# EAGLE board Line sensors - 4 (EAGLE 9.5.2)
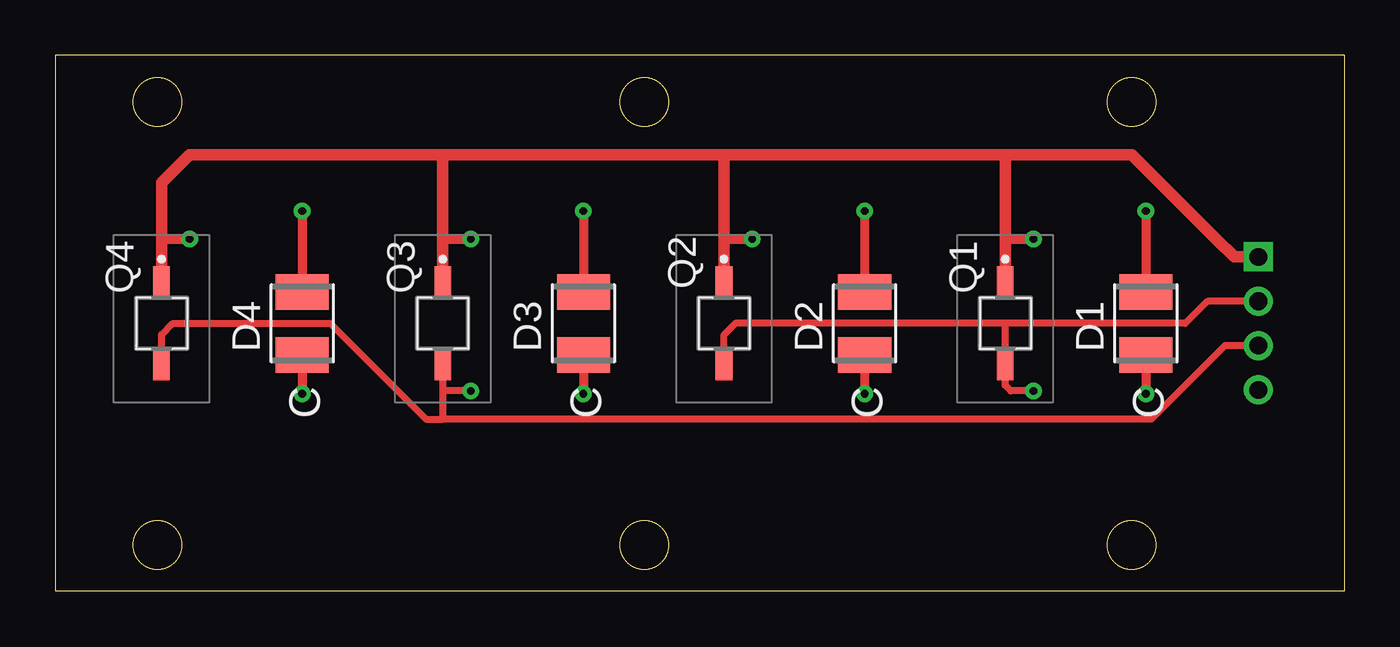
[diagram p0: board, top side]
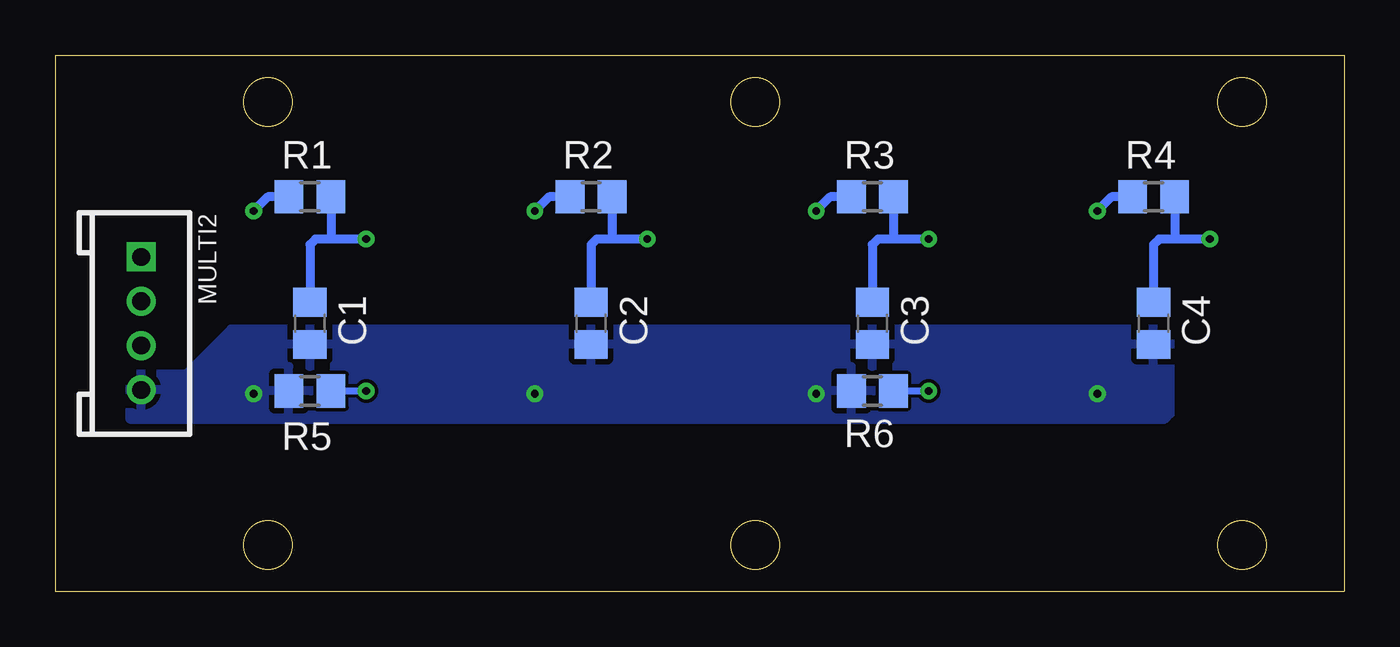
[diagram p1: board, bottom side, seen from below]

Size 58.2 x 24.19 mm. Coordinates in mm from the lower left corner, seen from the top.
Outline: 0,24.19 0,0 58.2,0 58.2,24.19 0,24.19
Outline: circle at 4.6,2.09 radius 1.1
Outline: circle at 48.6,22.09 radius 1.1
Outline: circle at 26.6,22.09 radius 1.1
Outline: circle at 4.6,22.09 radius 1.1
Outline: circle at 48.6,2.09 radius 1.1
Outline: circle at 26.6,2.09 radius 1.1
Copper layers (1*16): Top 0.035mm / dielectric 1.5mm / Bottom 0.035mm
Design rules "default": minimum track width 6mil, minimum drill 0.35mm, track to track 6mil, track to pad 6mil, pad to pad 6mil, via to via 6mil, smd to smd 6mil, copper to edge 40mil, drill to drill 6mil, minimum pad ring 10mil, minimum via ring 8mil, stop-mask expansion 4mil, vias tented up to drill 0mil, thermal gap 10mil

## Footprints (pad centres in the part's own frame; a part is rotated, then mirrored left to right if it is on the bottom)
C0805 = smd 1.3 x 1.5: 1 -0.95,0; 2 0.95,0
3528-2PIN = smd 1.6 x 2.4: 1 -1.425,0; 2 1.425,0
2.0_1X4 = drill 0.8 pad 1.27 square: 1 -3,0 | drill 0.8 pad 1.27: 2 -1,0; 3 1,0; 4 3,0
VEMT2520X01 = smd 1.35 x 0.75: 1 -1.9,0; 2 1.9,0
R0805 = smd 1.3 x 1.5: 1 -0.95,0; 2 0.95,0

## Placement (x,y rotation side)
C1  [C0805]  46.71,12.09 270 bottom
C2  [C0805]  34.01,12.09 270 bottom
C3  [C0805]  21.31,12.09 270 bottom
C4  [C0805]  8.61,12.09 270 bottom
D1  [3528-2PIN]  49.25,12.09 90 top
D2  [3528-2PIN]  36.55,12.09 90 top
D3  [3528-2PIN]  23.85,12.09 90 top
D4  [3528-2PIN]  11.15,12.09 90 top
MULTI2  TWIG_2.0  [2.0_1X4]  54.33,12.09 270 bottom
Q1  VEMT2520X01  [VEMT2520X01]  42.9,12.09 270 top
Q2  VEMT2520X01  [VEMT2520X01]  30.2,12.09 270 top
Q3  VEMT2520X01  [VEMT2520X01]  17.5,12.09 270 top
Q4  VEMT2520X01  [VEMT2520X01]  4.8,12.09 270 top
R1  [R0805]  46.71,17.81 0 bottom
R2  [R0805]  34.01,17.81 0 bottom
R3  [R0805]  21.31,17.81 0 bottom
R4  [R0805]  8.61,17.81 0 bottom
R5  [R0805]  46.71,9.04 0 bottom
R6  [R0805]  21.31,9.04 0 bottom

## Library data of the parts
C1-C4 = rcl; SPICEPREFIX: C
D1-D4 = Wurth_Elektronik_Optoelectronics_rev15b; COMPANY-URL: http://www.we-online.de; CREATED-BY: Christin Otto; CREATED-DATE: APR 2013; DATASHEET-URL: http://katalog.we-online.de/en/led/WL-SMTW?m=t&sq=smtw&sp=&sp=http%3A%2F%2Fwww.we-online.de%2Fweb%2Fen%2Felectronic_components%2Fsearchpage_PBS.php%3Fsearch%3Dsmtw; MANUFACTURER: Würth Elektronik eiSos GmbH
MULTI2 = CONNECTER
Q1-Q4 = Fototransistor; DESCRIPTION: Vishay VEMT2520X01 +/-15 IR + Visible Light Phototransistor, Surface Mount 2-Pin Reverse Gullwing Package; HEIGHT: 2mm; MANUFACTURER_NAME: Vishay; MANUFACTURER_PART_NUMBER: VEMT2520X01; MOUSER_PART_NUMBER: 782-VEMT2520X01; MOUSER_PRICE-STOCK: https://www.mouser.com/Search/Refine.aspx?Keyword=782-VEMT2520X01; RS_PART_NUMBER: 7689417P; RS_PRICE-STOCK: http://uk.rs-online.com/web/p/products/7689417P
R1-R6 = rcl; SPICEPREFIX: R

## Nets
GND: C1.2 C2.2 C3.2 C4.2 D1.1 D2.1 D3.1 D4.1 MULTI2.4 R5.1 R6.1
N$1: D1.2 R1.1
N$2: D2.2 R2.1
N$3: D3.2 R3.1
N$4: D4.2 R4.1
SIG1: MULTI2.2 Q1.2 Q2.2 R5.2
SIG2: MULTI2.3 Q3.2 Q4.2 R6.2
V+: C1.1 C2.1 C3.1 C4.1 MULTI2.1 Q1.1 Q2.1 Q3.1 Q4.1 R1.2 R2.2 R3.2 R4.2

## Tracks (layer width: path | path; a pad name or v marks a point on that pad's centre or on a via)
GND  (via drill 0.35)
  Top 0.406: D4.1 v11.15,8.92 | D3.1 v23.85,8.92 | D2.1 v36.55,8.92 | D1.1 v49.25,8.92
  pour Bottom: 7.84,11.84 50.26,11.84 52.29,9.81 54.83,9.81 54.83,7.77 8.1,7.77 7.84,8.03
N$1  (via drill 0.35)
  Top 0.406: v49.25,17.17 D1.2
  Bottom 0.406: R1.1 48.61,17.81 v49.25,17.17
N$2  (via drill 0.35)
  Top 0.406: v36.55,17.17 D2.2
  Bottom 0.406: R2.1 35.91,17.81 v36.55,17.17
N$3  (via drill 0.35)
  Top 0.406: v23.85,17.17 D3.2
  Bottom 0.406: R3.1 23.21,17.81 v23.85,17.17
N$4  (via drill 0.35)
  Top 0.406: v11.15,17.17 D4.2
  Bottom 0.406: R4.1 10.51,17.81 v11.15,17.17
SIG1  (via drill 0.35)
  Top 0.305: Q2.2 30.2,11.58 30.7,12.09 42.9,12.09 | 42.9,12.09 51.02,12.09 52.02,13.09 MULTI2.2 | 42.9,12.09 Q1.2 42.9,9.3 43.15,9.04 v44.17,9.04
  Bottom 0.305: R5.2 v44.17,9.04
SIG2  (via drill 0.35)
  Top 0.305: Q4.2 4.8,11.58 5.3,12.09 12.42,12.09 16.73,7.77 17.5,7.77 | Q3.2 17.5,9.04 | 17.5,9.04 17.5,7.77 | v18.77,9.04 17.5,9.04 | 17.5,7.77 49.5,7.77 52.82,11.09 MULTI2.3
  Bottom 0.305: R6.2 v18.77,9.04
V+  (via drill 0.35)
  Top 0.406: 4.8,15.9 v6.07,15.9 | 17.5,15.9 v18.77,15.9 | 30.2,15.9 v31.47,15.9 | 42.9,15.9 v44.17,15.9
  Top 0.508: 42.9,19.71 48.61,19.71 52.42,15.9 53.23,15.09 MULTI2.1 | 42.9,19.71 30.2,19.71 | 30.2,19.71 17.5,19.71 | 17.5,19.71 6.07,19.71 4.8,18.44 4.8,15.9 Q4.1 | Q3.1 17.5,15.9 17.5,19.71 | Q2.1 30.2,15.9 30.2,19.71 | Q1.1 42.9,15.9 42.9,19.71
  Bottom 0.406: v6.07,15.9 7.59,15.9 | 7.59,15.9 8.35,15.9 8.61,15.65 C4.1 | R4.2 7.66,15.97 7.59,15.9 | v18.77,15.9 20.29,15.9 | 20.29,15.9 21.05,15.9 21.31,15.65 C3.1 | R3.2 20.36,15.97 20.29,15.9 | v31.47,15.9 32.99,15.9 | 32.99,15.9 33.75,15.9 34.01,15.65 C2.1 | R2.2 33.06,15.97 32.99,15.9 | v44.17,15.9 45.69,15.9 | 45.69,15.9 46.45,15.9 46.71,15.65 C1.1 | R1.2 45.76,15.97 45.69,15.9